# Altium PCB SwitchUniControl.PcbDoc
Units mm, origin at the board's own origin, x right, y up, seen from the top; angles counter-clockwise.
Board outline 60.32 x 41.27 mm, 2 copper layers (Top Layer, Bottom Layer); 17 components, 11 nets, 51 pads, 0 vias.
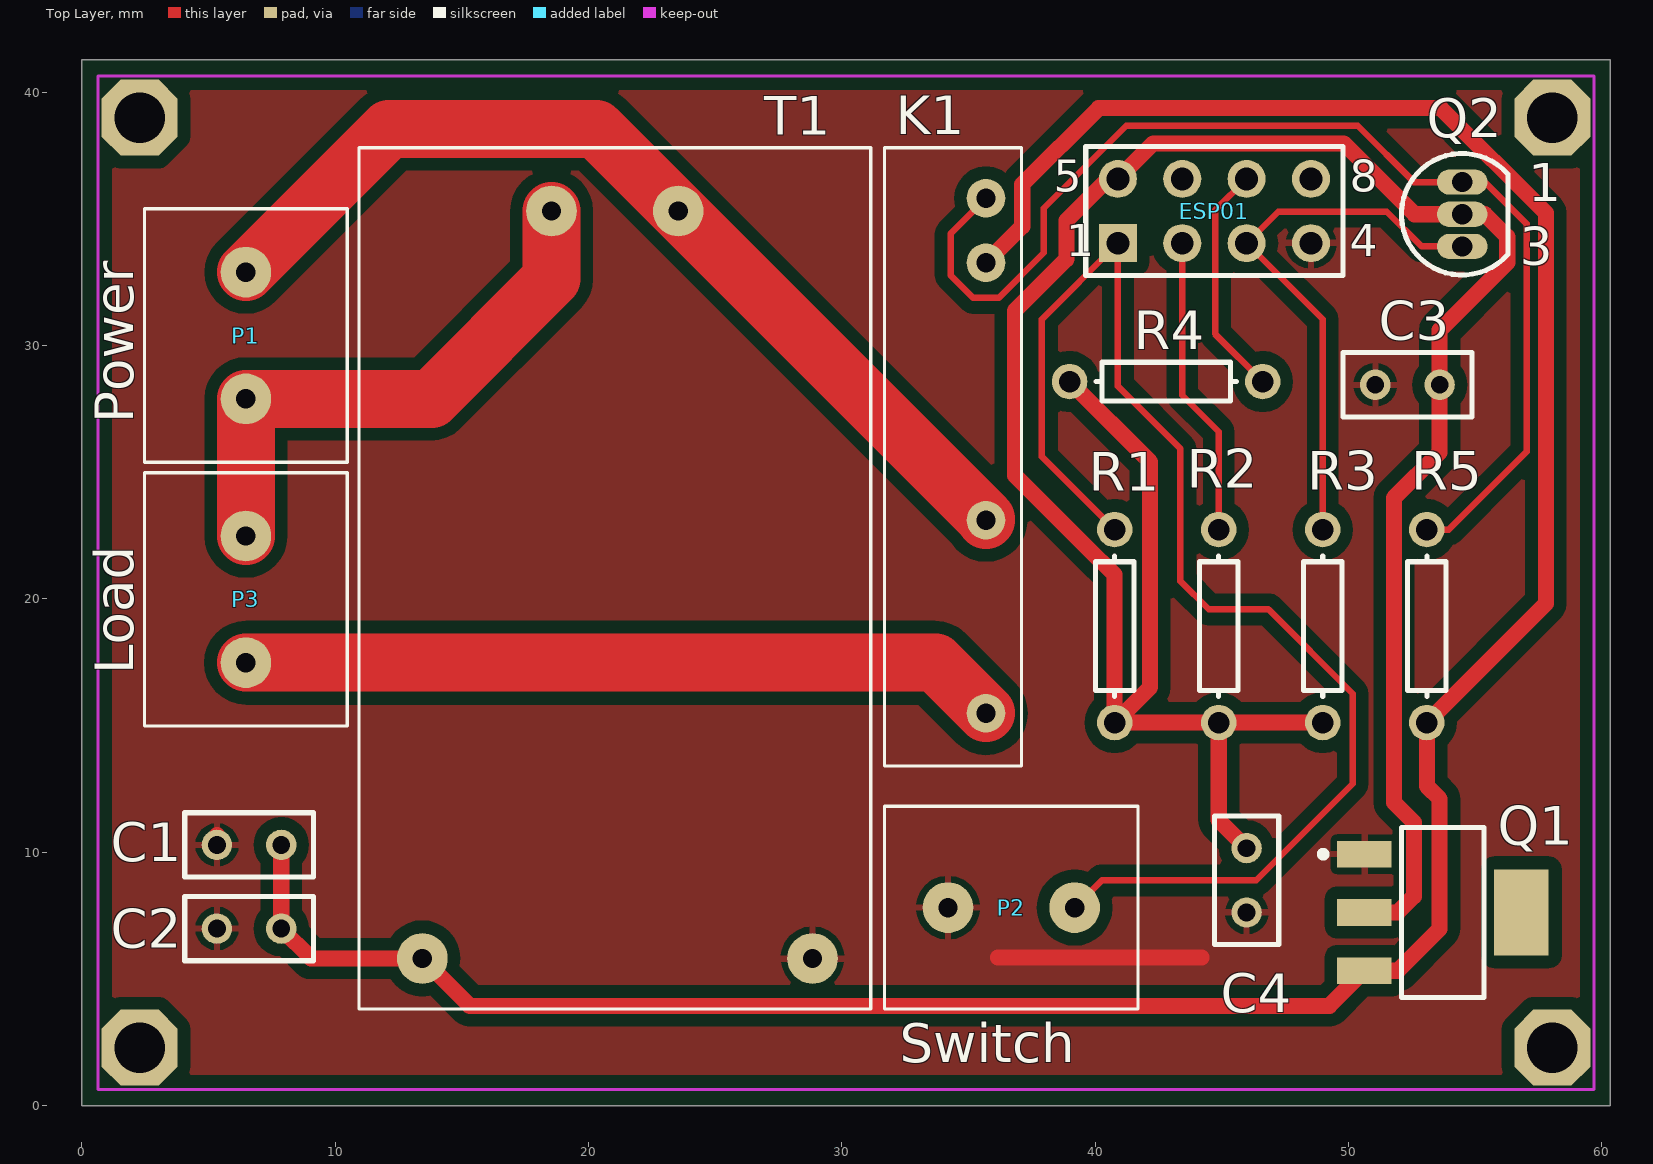
[diagram p0: Top Layer view]
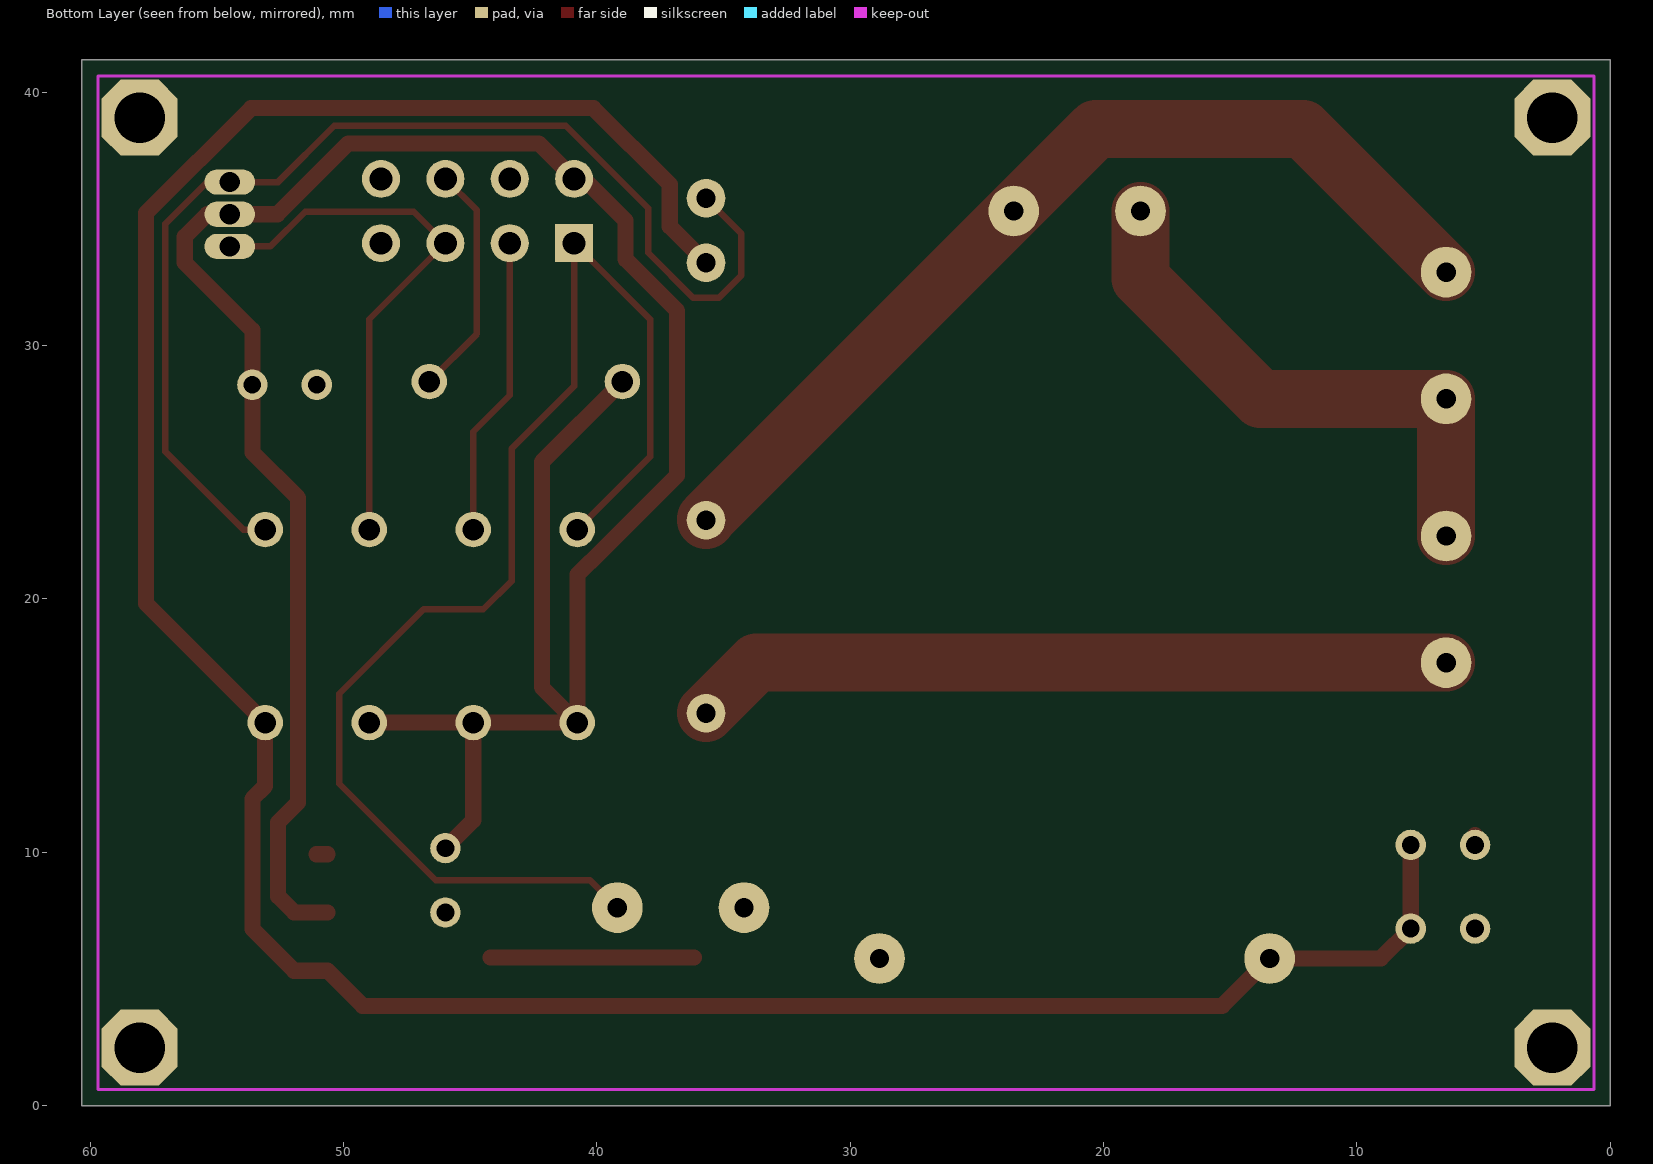
[diagram p1: Bottom Layer view, seen from below]

## Layer stack, top to bottom
Top Solder: solder mask 0.0102, Solder Resist, Dk 3.5
Top Layer: signal copper 0.0356
Dielectric 1: dielectric 0.32, FR-4, Dk 4.8
Bottom Layer: signal copper 0.0356
Bottom Solder: solder mask 0.0102, Solder Resist, Dk 3.5

## Board outline
0,0 60.325,0 60.325,41.275 0,41.275

## Design rules (kind name [scope] priority, off if disabled: settings)
Clearance "Polygon Clearence" [InPolygon] p1: gap=0.5 ignorepadtopadclearanceinfootprint=TRUE
PolygonConnect [All] p1: connectstyle=Relief reliefconductorwidth=0.254 reliefentries=4 polygonreliefangle="90 Angle" airgapwidth=0.254
RoutingLayers [All] p1: top layer_v5=TRUE bottom layer_v5=FALSE
RoutingVias [All] p1: holewidth=0.711 width=1.27 viastyle="Through Hole" minholewidth=0.711 minwidth=1.27 maxholewidth=0.711 maxwidth=1.27
SolderMaskExpansion [All] p1: expansion=0.102
Width "Schematic Width Constraint_7" [InNet('Power GND')] p1: maxlimit=2.54 minlimit=1.524 preferedwidth=2.286
Width "Schematic Width Constraint_6" [InNet('NetK1_1')] p2: maxlimit=2.54 minlimit=1.524 preferedwidth=2.286
Width "Schematic Width Constraint_3" [InNet('+5VDC')] p3: maxlimit=0.762 minlimit=0.508 preferedwidth=0.635
Width "Schematic Width Constraint_2" [InNet('+3.3VDC')] p4: maxlimit=0.762 minlimit=0.508 preferedwidth=0.635
Width "Schematic Width Constraint_1" [InNet('220VAC')] p5: maxlimit=2.54 minlimit=1.524 preferedwidth=2.286
Width "Schematic Width Constraint" [InNet('GND')] p6: maxlimit=0.762 minlimit=0.508 preferedwidth=0.635
Width [All] p7: maxlimit=0.254 minlimit=0.254 preferedwidth=0.254
29 further rules are at their usual default settings.

## Components (designator, comment, footprint, x,y, rotation, side; value= is the part's Value field where it differs from the comment)
C1 "Cap Pol1" RAD-0.1 6.604,10.287 r180 top value=100uf
C2 "Cap" RAD-0.1 6.604,6.985 r180 top value=100nf
C3 "Cap" RAD-0.1 52.324,28.448 r0 top value=100nF
C4 "Cap" RAD-0.1 45.974,8.89 r90 top value=100nF
ESP01 "Header 4X2A" HDR2X4_CEN 40.894,34.036 r0 top
K1 "G3MB-202P DC5" "G3MB-202P DC5" 31.687,37.806 r270 top
P1 "Power" ScrewTerminal-X2 10.477,25.393 r90 top
P2 "Switch" ScrewTerminal-X2 31.687,3.81 r0 top
P3 "Load" ScrewTerminal-X2 10.477,14.979 r90 top
Q1 "Regulador 3.3V" SOT223 53.721,7.62 r270 top
Q2 "2N7000" SOT54 54.483,35.179 r0 top
R1 "Res1" AXIAL-0.3 40.767,18.923 r90 top value=10K
R2 "Res1" AXIAL-0.3 44.873,18.923 r90 top value=10K
R3 "Res1" AXIAL-0.3 48.98,18.923 r270 top value=10K
R4 "Res1" AXIAL-0.3 42.799,28.575 r180 top value=1K
R5 "Res1" AXIAL-0.3 53.086,18.923 r270 top value=10K
T1 "220VAC - 5VDC" HLK-PM 23.542,35.306 r270 top

## Footprints (in the part's own frame and the unit in brackets; to place one, negate y for a bottom-side part, rotate by r counter-clockwise, add the part's x,y. Pads: shape width x height; smd on the part's side, far side on the other; paste and mask are expansions set on the pad)
AXIAL-0.3 [mm] "Axial Device, Thru-Hole; 2 Leads; 0.3 in Pin Spacing"
  round 1.4 hole 0.85: 1(-3.81,0) 2(3.81,0)
  silkscreen extent -2.77,-0.76 2.77,0.76
"G3MB-202P DC5" [mil] "RELAY MINI SSR 240VAC@2A ZERO"
  round 60 hole 30: 1(878.74,157.48) 2(578.74,157.48) 3(178.74,157.48) 4(78.74,157.48)
  silkscreen extent 0,0 961,213
HDR2X4_CEN [mm] "Connector; Header; 4x2 Position"
  rect 1.5x1.5 hole 0.9: 1(0,0)
  round 1.5 hole 0.9: 2(2.54,0) 3(5.08,0) 4(7.62,0) 5(0,2.54) 6(2.54,2.54) 7(5.08,2.54) 8(7.62,2.54)
  silkscreen extent -1.27,-1.27 8.89,3.81
HLK-PM [mm] "Trans 220VAC-5/12/3,3 VDC"
  round 2 hole 0.762: 1(0,0) 2(0,-5) 3(29.5,5.3) 4(29.5,-10.1)
  silkscreen extent -2.5,-12.6 31.5,7.6
RAD-0.1 [mm] "Radial Cap, Thru-Hole; 2 Leads; 0.1 in Pin Spacing"
  round 1.2 hole 0.7: 1(-1.27,0) 2(1.27,0)
  silkscreen extent -2.54,-1.27 2.54,1.27
ScrewTerminal-X2 [mm]
  round 2 hole 0.762: 1(2.5,4) 2(7.5,4)
  silkscreen extent 0,0 10,8
SOT54 [mm] "TO, Flat Index; 3 In-Line, Axial Leads; Body Dia. 4.6mm; Leads 0.48 x 0.45 mm (max)"
  oval 2x1 hole 0.8: 1(0,1.27) 2(0,0) 3(0,-1.27)
  silkscreen extent -2.4,-2.4 1.8,2.4
SOT223 [mm] "SOT-223/SC-73; 4 Leads; Body 6.7 x 7.3 mm, inc. leads (LxW max)"
  rect 1.05x2.15 smd: 1(-2.3,-3.1) 2(0,-3.1) 3(2.3,-3.1)
  rect 3.4x2.15 smd: 4(0,3.1)
  silkscreen extent -3.35,-4.85 3.35,1.62

## Part data
C1: "Polarized Capacitor (Radial)", LatestRevisionDate=17-Jul-2002, LatestRevisionNote="Re-released for DXP Platform.", PackageDescription="Polarized Capacitor (Radial); 2 Leads", PackageReference=RB7.6-15, Published=8-Jun-2000, Publisher="Altium Limited"
C2 C3 C4: "Capacitor", LatestRevisionDate=17-Jul-2002, LatestRevisionNote="Re-released for DXP Platform.", PackageDescription="Radial Cap, Thru-Hole; 2 Leads; 0.3 in Pin Spacing", PackageReference=RAD-0.3, Published=8-Jun-2000, Publisher="Altium Limited"
ESP01: "Header, 4-Pin, Dual row", LatestRevisionDate=17-Jul-2002, LatestRevisionNote="Re-released for DXP Platform.", Publisher="Altium Limited"
K1: "RELAY MINI SSR 240VAC@2A ZERO", Mfr=Omron, Mfr PN="G3MB-202P DC5"
P1 P2 P3: library part ScrewTerminal
Q1: library part AMS1117
Q2: "N-channel Enhancement Mode Field-effect Transistor", Code_JEDEC=TO-92, Code_JEITA=SC-43, ComponentLink1Description="Manufacturer Link", ComponentLink1URL=http://www.semiconductors.philips.com/, ComponentLink2Description=Datasheet, ComponentLink2URL=http://www.semiconductors.philips.com/acrobat/datasheets/2N7000-03.pdf, DatasheetVersion=19-May-2000, LatestRevisionDate=12-Dec-2006, LatestRevisionNote="Footprint pad sequence fixed.", PackageDescription="Plastic Single-Ended Leaded (through hole) package; 3 Leads (TO-92)", PackageReference=SOT54, PackageVersion=Feb-1997, Published=17-Sep-2003, Publisher="Altium Limited"
R1 R2 R3 R4 R5: "Resistor", LatestRevisionDate=17-Jul-2002, LatestRevisionNote="Re-released for DXP Platform.", PackageDescription="Axial Device, Thru-Hole; 2 Leads; 0.3 in Pin Spacing", PackageReference=AXIAL-0.3, Published=8-Jun-2000, Publisher="Altium Limited"
T1: library part HLK-PM, "HLK-PM*", Mfr=HLK-PM01

## Free pads (board coordinates)
  oct 3x3 hole 2: 1(2.286,38.989) 2(58.039,38.989) 3(58.039,2.286) 4(2.286,2.286)

## Nets (pads, with @x,y where several pads share a name; then routed paths per layer and width w, separated by ;. In a path a pad name is that pad's centre, name@x,y a point inside that pad or via, vN(x,y) a via of type N, cw(c..) or ccw(c..) an arc to the next point about the centre after c; other vN are vias at no path point)
220VAC: K1.2 P1.2 T1.1 | length 38
  Top Layer w2.286: P1.2 12.128,38.544 20.303,38.544 T1.1 35.687,23.161 K1.2
+3.3VDC: C3.2 C4.2 ESP01.5 Q1.2 Q2.2 R1.1 R2.1 R3.2 R4.2 | length 101.9
  Top Layer w0.635: R4.2 42.164,25.4 42.164,16.51 R1.1 ; C4.2 44.873,11.261 R2.1 ; R3.2 R2.1 ; Q1.2 51.943,7.62 52.578,8.255 52.578,11.176 51.791,11.963 51.791,23.979 53.594,25.783 C3.2 53.594,30.607 56.261,33.274 56.261,34.29 55.372,35.179 Q2.2 52.603,35.179 49.809,37.973 42.291,37.973 ESP01.5 40.513,36.576 38.862,34.925 38.862,33.401 36.83,31.369 36.83,24.872 40.24,21.461 40.261,21.461 40.767,20.955 R1.1 ; R1.1 R2.1
+5VDC: C1.1 C2.1 K1.3 Q1.3 R5.2 T1.4 | length 109.3
  Top Layer w0.635: C1.1 C2.1 9.053,5.806 T1.4 15.311,3.937 49.238,3.937 Q1.3 51.943,5.32 53.594,6.971 53.594,12.104 53.086,12.612 R5.2 57.785,19.812 57.785,35.23 53.645,39.37 40.132,39.37 37.118,36.356 37.118,34.697 K1.3
GND: C1.2 C2.2 C3.1 C4.1 ESP01.4 P2.1 Q1.1 T1.3 | length 8.9
  Top Layer w0.635: C1.2 C1.2@5.334,10.668 ; 36.155,5.842 44.196,5.842 ; Q1.1 Q1.1@51.054,9.92
NetESP01_1: ESP01.1 P2.2 R1.2 | length 53.3
  Top Layer w0.254: P2.2 40.267,8.89 46.355,8.89 50.165,12.7 50.165,16.253 46.835,19.583 44.475,19.583 43.358,20.701 43.358,25.933 40.894,28.397 ESP01.1 37.897,31.039 37.897,25.603 R1.2
NetESP01_2: ESP01.2 R2.2 | length 11.9
  Top Layer w0.254: ESP01.2 43.434,28.033 44.873,26.594 R2.2
NetESP01_3: ESP01.3 Q2.3 R3.1 | length 22.1
  Top Layer w0.254: R3.1 48.98,31.03 ESP01.3 47.219,35.281 51.511,35.281 52.883,33.909 Q2.3
NetESP01_7: ESP01.7 R4.1 | length 9.3
  Top Layer w0.254: ESP01.7 44.729,35.331 44.729,30.455 R4.1
NetK1_1: K1.1 P3.1 | length 30
  Top Layer w2.286: P3.1 33.694,17.479 K1.1
NetK1_4: K1.4 Q2.1 R5.1 | length 46.4
  Top Layer w0.254: K1.4 34.29,34.409 34.29,32.766 35.179,31.877 36.195,31.877 37.973,33.655 37.973,35.421 41.223,38.672 50.355,38.672 52.578,36.449 Q2.1 55.372,36.449 57.023,34.798 57.023,25.806 53.95,22.733 R5.1
"Power GND": P1.1 P3.2 T1.2 | length 22.1
  Top Layer w2.286: P3.2 P1.1 13.796,27.893 18.542,32.639 T1.2
pads on no net: ESP01.6 ESP01.8 Q1.4

## Polygon pours and split planes (outlines as drawn)
GND on Top Layer "Top Layer-No Net" (solid, pour order 18): 0,0 0,41.275 60.325,41.275 60.325,0

## Keep-outs
Keep-Out Layer:
  lines w0.127: 0.635,0.635 0.635,40.64 59.69,40.64 59.69,0.635 0.635,0.635

## Text inside footprints (layer, text, board x,y; h text height)
ESP01: Top Overlay "5" at 38.354,36.068 h1.27; Top Overlay "1" at 38.862,33.528 h1.27; Top Overlay "4" at 50.038,33.528 h1.27; Top Overlay "8" at 50.038,36.068 h1.27
Q2: Top Overlay "1" at 57.099,35.699 h1.5; Top Overlay "3" at 56.758,33.159 h1.5